# Allegro board powerModule_v1_3.brd
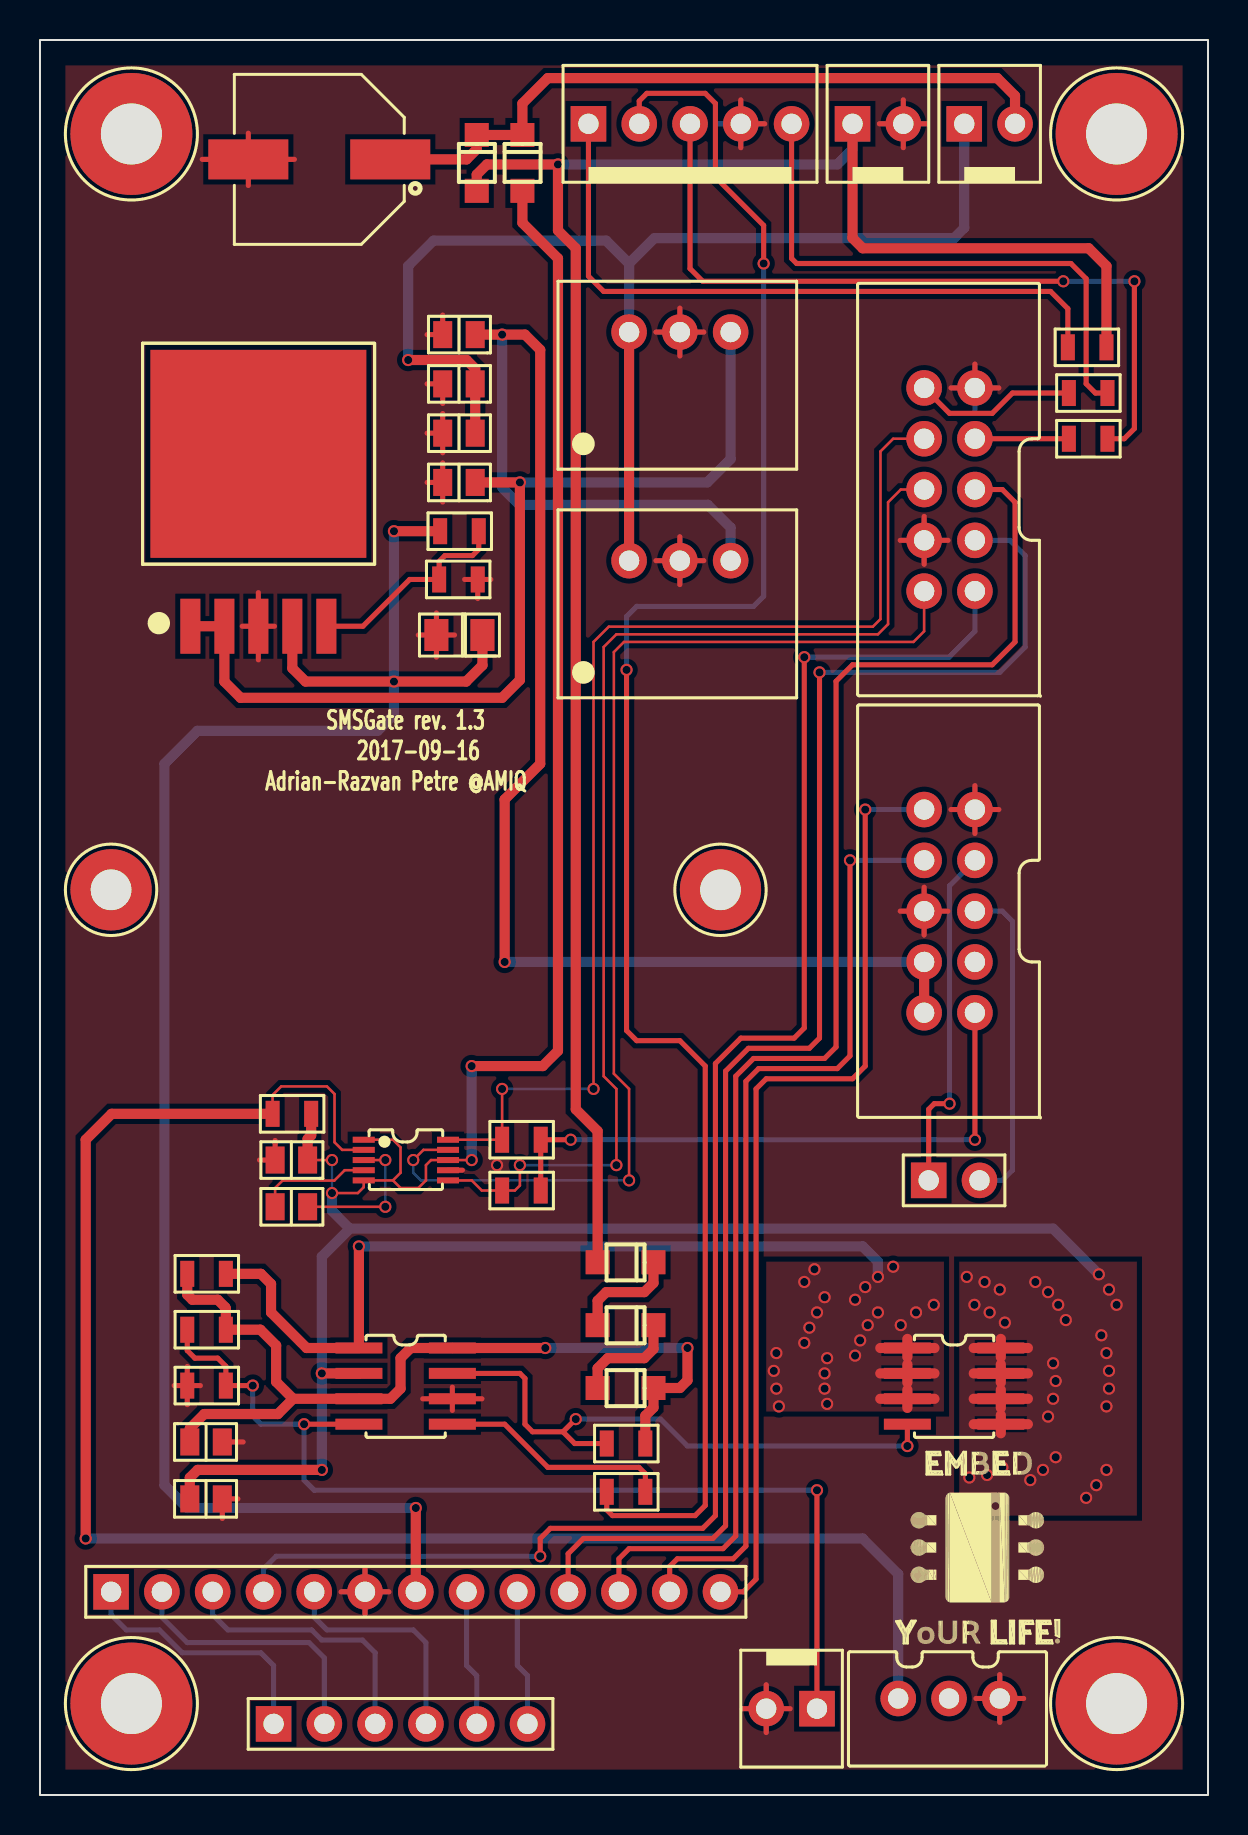
[diagram p0: board, top side]
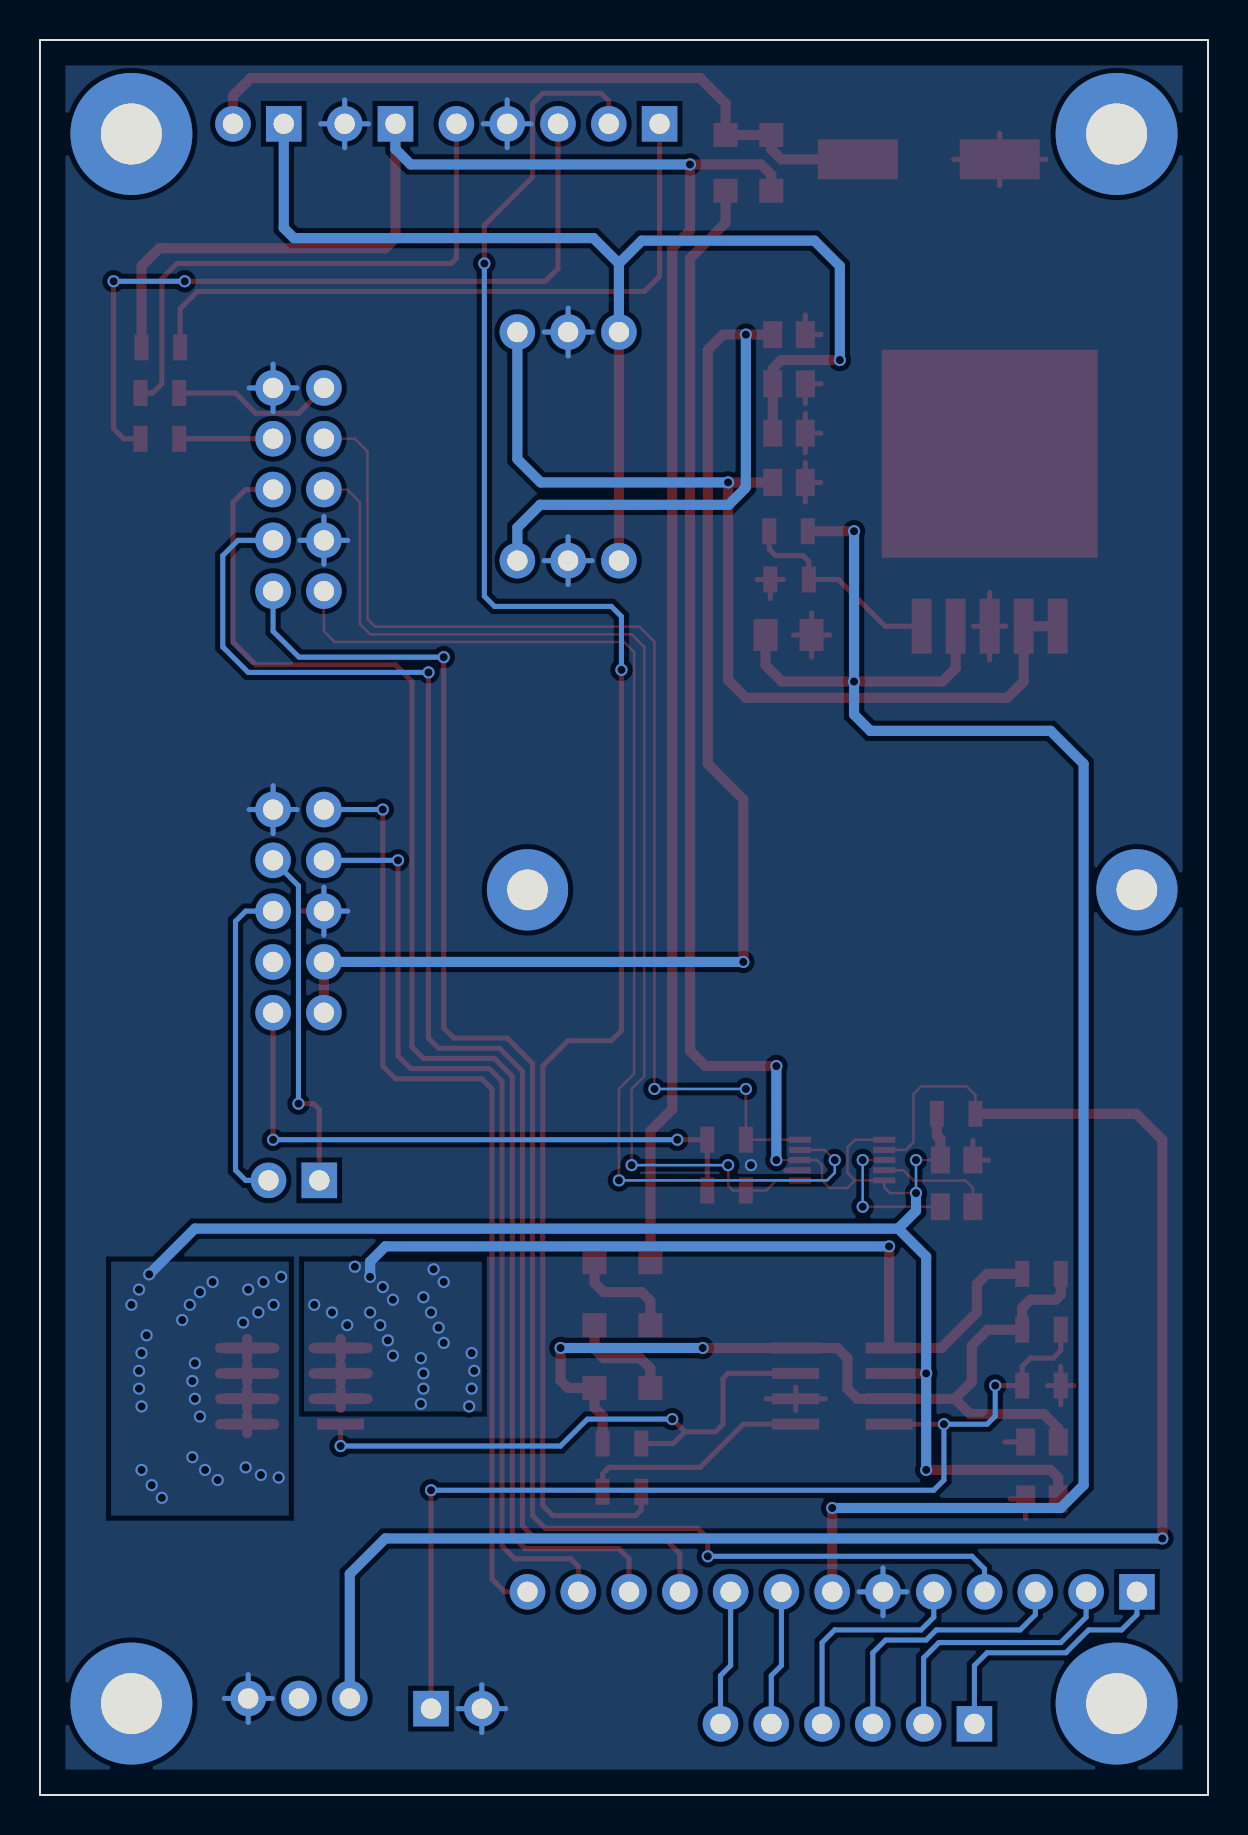
[diagram p1: board, bottom side, seen from below]

Outline 58.42 x 87.76 mm; copper layers: TOP, BOTTOM. Coordinates in mm from the lower left corner of the outline.
Outline path: rectangle 0,0 58.42,87.76

## Design rules (mm)
nets with their own width: min track width 0.127; nets CLR INT POL U2CF+ U2CF-
nets with their own width: min track width 0.254; nets CTS GND LED1 LED1_P3 LED1_P5 LED2 LINE_LED POWER Q1G RESET RI RST RXD SCL1 SDA1 SLP STAT_LED STATUS TS TXD U1STAT VIN VREG2ADJ VUSB
nets with their own width: min track width 0.508; nets +4V +5V +12V BATT CHARGEROUT COMMKAT K1 K2 Q1S SMALLVCC STAB1IN STAB2IN

## Placement (name value [footprint] x y rotation side)
C1  10u  [SMC0805_V1]  20.95 70.56 180 top
C2  22u  [SMC0805_V1]  20.95 65.63 180 top
C3  10u  [TAJ1206_V1]  22.13 58 180 top
C4  470u  [FK_SERIES_SIZE_F_V0]  13.97 81.79 180 top
C5  22u  [SMC0805_V1]  20.95 73.03 180 top
C6  10u  [SMC0805_V1]  20.95 68.1 180 top
C7  100n  [SMC0805_V1]  8.31 14.81 0 top
C8  4.7u  [SMC0805_V1]  12.57 31.75 180 top
C9  100n  [SMC0805_V1]  8.31 17.65 0 top
C10  4.7u  [SMC0805_V1]  12.57 29.41 180 top
D1  PMEG4020ER  [SOD123_V2]  21.84 81.66 90 top
D2  ES07B/G1  [SOD123_V2]  29.34 26.64 0 top
D3  PMEG4020ER  [SOD123_V2]  24.13 81.66 90 top
D4  ES07B/G1  [SOD123_V2]  29.34 23.5 0 top
D5  ES07B/G1  [SOD123_V2]  29.34 20.35 0 top
J1  CON2  [SOCKET_MX_0GRD_1X2_2-54_V0]  46.23 83.57 90 top
J2  CON2  [SOCKET_MX_0GRD_1X2_2-54_V0]  40.64 83.57 90 top
J3  CON5  [SOCKET_MX_0GRD_1X5_2-54_V0]  27.43 83.57 90 top
J4  CON10A  [IDC10_0GRD_2X5_2-54_V3]  45.49 65.28 180 top
J5  CON6  [JUMPER_0GRD_1X6_2-54_V0]  11.68 3.56 90 top
J6  CON13  [JUMPER_0GRD_1X13_2-54_V0]  3.56 10.16 90 top
J7  CON2  [JUMPER_0GRD_1X2_2-54_V0]  44.45 30.73 90 top
J8  CON2  [SOCKET_MX_0GRD_1X2_2-54_V0]  38.86 4.32 270 top
J9  CON10A  [IDC10_0GRD_2X5_2-54_V3]  45.49 44.2 180 top
J10  CON3  [JST3_0GRD_2-54_V0]  42.93 4.83 0 top
NOREF  -  []  0 87.76 0 top
NOREF#2  -  [unnamed#2]  53.85 4.57 0 top
NOREF#3  -  [unnamed#3]  3.56 45.26 0 top
NOREF#4  -  [unnamed#2]  4.57 4.57 0 top
NOREF#5  -  [unnamed#2]  4.57 83.06 0 top
NOREF#6  -  [unnamed#2]  53.85 83.06 0 top
NOREF#7  -  [unnamed#3]  34.04 45.26 0 top
NOREF#8  -  []  42.16 7.11 0 top
NOREF#9  -  []  58.42 0 90 top
Q1  SI4463CDY  [SOIC8_V1]  45.72 22.35 0 top
R1  2k2  [SMR0805_V2]  20.02 63.2 0 top
R2  1k  [SMR0805_V2]  21.89 60.78 180 top
R3  0.68  [SMR0805_V2]  7.37 26.06 0 top
R4  620  [SMR0805_V2]  53.34 72.39 180 top
R5  62  [SMR0805_V2]  51.46 67.82 0 top
R6  1k  [SMR0805_V2]  28.35 17.57 0 top
R7  62  [SMR0805_V2]  51.46 70.1 0 top
R8  12k1  [SMR0805_V2]  7.37 23.27 0 top
R9  0.025  [SMR0805_V2]  11.63 34.06 0 top
R10  1k  [SMR0805_V2]  28.35 15.16 0 top
R11  220k  [SMR0805_V2]  7.37 20.47 0 top
R12  3k3  [SMR0805_V2]  23.11 32.77 0 top
R13  3k3  [SMR0805_V2]  23.11 30.23 0 top
U1  BQ2057WSN  [SOIC8_V1]  18.29 22.35 0 top
U2  LTC4150  [MSOP10_V1]  18.3 32.77 0 top
VREG1  AMSR2-7805-NZ  [AMSR2-7805-NZ_V0]  29.46 73.15 0 top
VREG2  MIC29302WU  [TO_236_5LEAD]  10.92 64.64 90 top
VREG3  AMSR2-7805-NZ  [AMSR2-7805-NZ_V0]  29.46 61.72 0 top

## Library data of the parts
C1 C2 C5-C10 = CAP NP
C3 = CAPACITOR POL
C4 = CAP_1
D1 D3 = DIODE SCHOTTKY_3
D2 D4 D5 = DIODE
J1 J2 J7 J8 = CON2
J3 = CON5
J4 J9 = CON10A
J5 = CON6
J6 = CON12_0
J10 = CON3
Q1 = MOSFET P DGS_4
R1-R13 = R
U1 = BQ2057_1
U2 = LTC4150_7
VREG1 VREG3 = MCP1700_7
VREG2 = MCP1700_9

## Footprints (pads in the part's own frame, mm; a bottom-side part is the same pattern mirrored in y, then rotated)
AMSR2-7805-NZ_V0
  round 1.778 hole 1.016: 1(0,0) 2(2.54,0) 3(5.08,0)
FK_SERIES_SIZE_F_V0
  rect 4x2 smd: 1(-3.55,0) 2(3.55,0)
IDC10_0GRD_2X5_2-54_V3
  round 1.778 hole 1.016: 1(-1.27,5.08) 2(1.27,5.08) 3(-1.27,2.54) 4(1.27,2.54) 5(-1.27,0) 6(1.27,0) 7(-1.27,-2.54) 8(1.27,-2.54) 9(-1.27,-5.08) 10(1.27,-5.08)
JST3_0GRD_2-54_V0
  round 1.778 hole 1.016: 1(0,0) 2(2.54,0) 3(5.08,0)
JUMPER_0GRD_1X2_2-54_V0
  rect 1.778x1.778 hole 1.016: 1(0,0)
  round 1.778 hole 1.016: 2(0,-2.54)
JUMPER_0GRD_1X6_2-54_V0
  rect 1.778x1.778 hole 1.016: 1(0,0)
  round 1.778 hole 1.016: 2(0,-2.54) 3(0,-5.08) 4(0,-7.62) 5(0,-10.16) 6(0,-12.7)
JUMPER_0GRD_1X13_2-54_V0
  rect 1.778x1.778 hole 1.016: 1(0,0)
  round 1.778 hole 1.016: 2(0,-2.54) 3(0,-5.08) 4(0,-7.62) 5(0,-10.16) 6(0,-12.7) 7(0,-15.24) 8(0,-17.78) 9(0,-20.32) 10(0,-22.86) 11(0,-25.4) 12(0,-27.94) 13(0,-30.48)
MSOP10_V1
  rect 1.1x0.3 smd: 1(-2.108,0) 2(-2.108,-0.508) 3(-2.108,-1.016) 4(-2.108,-1.524) 5(-2.108,-2.032) 6(2.108,-2.032) 7(2.108,-1.524) 8(2.108,-1.016) 9(2.108,-0.508) 10(2.108,0)
SMC0805_V1
  rect 0.95x1.35 smd: 1(-0.813,0) 2(0.813,0)
SMR0805_V2
  rect 0.7x1.3 smd: 1(0,0) 2(1.93,0)
SOCKET_MX_0GRD_1X2_2-54_V0
  rect 1.778x1.778 hole 1.016: 1(0,0)
  round 1.778 hole 1.016: 2(0,-2.54)
SOCKET_MX_0GRD_1X5_2-54_V0
  rect 1.778x1.778 hole 1.016: 1(0,0)
  round 1.778 hole 1.016: 2(0,-2.54) 3(0,-5.08) 4(0,-7.62) 5(0,-10.16)
SOD123_V2
  rect 1.2x1.2 smd: 1(1.346,0) 2(-1.446,0)
SOIC8_V1
  rect 2.35x0.55 smd: 1(-2.337,0) 2(-2.337,-1.27) 3(-2.337,-2.54) 4(-2.337,-3.81) 5(2.337,-3.81) 6(2.337,-2.54) 7(2.337,-1.27) 8(2.337,0)
TAJ1206_V1
  rect 1.2x1.6 smd: 1(0,0) 2(2.301,0)
TO_236_5LEAD
  rect 2.75x1 smd: 1(-6.2,3.401) 2(-6.2,1.699) 3(-6.2,0) 4(-6.2,-1.699) 5(-6.2,-3.401)
  rect 10.4x10.8 smd: 6(2.421,0)
unnamed#2
  round 6.096 hole 3.048 unplated: (0,0)
unnamed#3
  round 4.064 hole 2.032 unplated: (0,0)

## Nets
+3V3: J9.1 R12.2 R13.2
+4V: C3.1 J6.7 R1.1 VREG2.4(OUT)
+5V: C5.1 J9.2 J9.4 VREG3.3(OUT)
+12V: D1.2(A) D2.2(A) J2.1 R4.1
GND: C1.2 C2.2 C3.2 C4.2 C5.2 C6.2 C7.2 C8.2 C9.2 J2.2 J3.4 J4.4 J4.9 J6.6 J8.2 J9.6 J9.9 J10.3 R2.1 R11.1 U1.6(VSS) U2.7 VREG1.2 VREG2.3 VREG3.2
VIN: J5.5 J6.8
BATT: J10.1 R9.1 U2.2(SENSE-)
CHARGEROUT: C7.1 C8.1 D3.2(A) Q1.5(D1) Q1.6(D2) Q1.7(D3) Q1.8(D4) R9.2 U1.2(BATT) U2.1(SENSE+) U2.5(\\S\H\D\N) U2.8(VDD)
CLR: J4.2 U2.9(\C\L\R)
COMMKAT: C4.1 D1.1(C) D3.1(C) J1.2
CTS: J5.2 J6.2
INT: J4.8 R12.1 U2.10(\I\N\T)
K1: D2.1(K) D4.2(A)
K2: D4.1(K) D5.2(A)
LED1: J4.7 R5.1
LED1_P3: J3.3 R5.2
LED1_P5: J3.5 R7.2
LED2: J4.10 R7.1
LINE_LED: J3.1 R4.2
POL: J4.6 R13.1 U2.6(POL)
POWER: J4.3 J6.10
Q1G: Q1.4(G) R6.1 U1.7(CC)
Q1S: Q1.1(S1) Q1.2(S2) Q1.3(S3) R3.2 U1.1(SNS)
RESET: J4.5 J6.11
RI: J5.4 J6.5
RST: J5.3 J6.3
RXD: J6.13 J9.10
SCL1: J7.2 J9.5
SDA1: J7.1 J9.7
SLP: J5.1 J6.1
SMALLVCC: C9.1 D5.1(K) R3.1 R6.2 R8.2 U1.3(VCC) U1.8(COMP)
STAB1IN: C1.1 C6.1 J1.1 VREG1.1(VCC) VREG3.1(VCC)
STAB2IN: C2.1 VREG1.3(OUT) VREG2.1(EN) VREG2.2(IN)
STAT_LED: J3.2 R10.1
STATUS: J4.1 J6.4
TS: J8.1 R8.1 R11.2 U1.4(TS)
TXD: J6.12 J9.8
U1STAT: R10.2 U1.5(STAT)
U2CF+: C10.1 U2.3(CF+)
U2CF-: C10.2 U2.4(CF-)
VREG2ADJ: R1.2 R2.2 VREG2.5(ADJ)
VUSB: J5.6 J6.9

Pads without a net: J9 3; J10 2; VREG2 6

## Via types
v1: diameter 0.61, hole 0.406, TOP to BOTTOM, 100 vias

## Routing (per net, layer and track width the routed paths; a pad name or vN(x,y) marks a point on that pad's centre or on a via; arc(x,y) is an arc through that point)
+3V3: length 30.6
  TOP w0.254: R13.2 R12.2 v1(26.54,32.77) ; v1(46.76,32.77) J9.1
  BOTTOM w0.254: v1(26.54,32.77) v1(46.76,32.77)
+4V: length 91
  TOP w0.508: R1.1 v1(17.7,63.2) ; VREG2.4 12.62,56.34 13.28,55.68 v1(17.7,55.68) 21.32,55.68 22.13,56.49 C3.1 ; v1(18.8,14.35) J6.7
  BOTTOM w0.508: v1(18.8,14.35) 7.37,14.35 6.22,15.49 6.22,51.56 7.87,53.21 16.89,53.21 17.7,54.03 v1(17.7,55.68) v1(17.7,63.2)
+5V: length 80
  TOP w0.508: C5.1 v1(23.11,73.03) 24.26,73.03 25.02,72.26 25.02,51.56 23.24,49.78 v1(23.24,41.66) ; J9.4 J9.2
  BOTTOM w0.508: v1(23.11,73.03) 23.11,65.41 23.19,65.33 23.19,65.3 23.97,64.52 33.4,64.52 34.54,63.37 VREG3.3 ; J9.4 v1(23.24,41.66)
+12V: length 100.2
  TOP w0.508: J2.1 40.64,77.85 41.15,77.34 52.45,77.34 53.34,76.45 R4.1 ; D2.2 27.89,33.2 26.8,34.29 26.8,77.34 25.91,78.23 v1(25.91,81.53) 22.35,81.53 21.84,81.03 D1.2
  BOTTOM w0.508: J2.1 40.64,82.3 39.88,81.53 v1(25.91,81.53)
GND: length 141.6
  TOP w0.254: 9.9,14.81 C7.2 9.12,13.83 ; J9.9 47.96,49.28 ; J9.9 46.76,48.08 ; J9.9 45.57,49.28 ; J9.9 46.76,50.47 ; J3.4 35.05,84.76 ; J3.4 35.05,82.37 ; J3.4 36.25,83.57 ; VREG1.2 32,74.35 ; VREG1.2 30.81,73.15 ; VREG1.2 33.2,73.15 ; VREG1.2 32,71.96 ; VREG2.3 11.73,58.44 ; VREG2.3 10.12,58.44 ; VREG2.3 10.92,60.12 ; VREG2.3 10.92,56.76 ; R11.1 8.02,20.47 ; R11.1 7.37,19.52 ; R11.1 6.71,20.47 ; R11.1 7.37,21.43 ; U1.6 20.62,20.39 ; U1.6 20.62,19.23 ; U1.6 19.14,19.81 ; U1.6 22.11,19.81 ; 48.01,3.63 J10.3 ; J10.3 48.01,6.02 ; J10.3 46.81,4.83 ; J10.3 49.2,4.83 ; 19.36,68.1 C6.2 ; C6.2 20.14,69.08 ; C6.2 20.14,67.12 ; J4.4 45.42,62.74 ; J4.4 43.03,62.74 ; J4.4 44.22,61.54 ; J4.4 44.22,63.93 ; C3.2 19.83,59.11 ; C3.2 18.92,58 ; C3.2 20.73,58 ; C3.2 19.83,56.9 ; J4.9 46.76,71.55 ; J4.9 47.96,70.36 ; J4.9 45.57,70.36 ; 44.22,43 J9.6 ; J9.6 44.22,45.39 ; J9.6 45.42,44.2 ; J9.6 43.03,44.2 ; C4.2 10.42,83.09 ; C4.2 10.42,80.48 ; C4.2 8.11,81.79 ; C4.2 12.73,81.79 ; J2.2 44.37,83.57 ; J2.2 43.18,82.37 ; J2.2 43.18,84.76 ; J2.2 41.99,83.57 ; 36.32,3.12 J8.2 ; J8.2 35.13,4.32 ; J8.2 37.52,4.32 ; J8.2 36.32,5.51 ; 20.14,74.01 C5.2 19.36,73.03 ; 21.89,59.83 R2.1 ; R2.1 21.24,60.78 ; R2.1 22.55,60.78 ; 19.36,65.63 C2.2 ; C2.2 20.14,66.61 ; C2.2 20.14,64.65 ; C9.2 10.16,17.65 ; 20.14,69.58 C1.2 19.36,70.56 ; VREG3.2 32,62.92 ; VREG3.2 33.2,61.72 ; VREG3.2 32,60.53 ; VREG3.2 30.81,61.72 ; 10.98,31.75 C8.2 11.76,32.73 ; U2.7 21.13,31.24 ; 16.26,8.97 J6.6 ; J6.6 17.45,10.16 ; J6.6 16.26,11.35 ; J6.6 15.06,10.16
  BOTTOM w0.254: J9.9 46.76,50.47 ; J9.9 45.57,49.28 ; J9.9 46.76,48.08 ; J9.9 47.96,49.28 ; J4.4 44.22,63.93 ; J4.4 43.03,62.74 ; J4.4 44.22,61.54 ; J4.4 45.42,62.74 ; 41.99,83.57 J2.2 ; J2.2 43.18,84.76 ; J2.2 43.18,82.37 ; J2.2 44.37,83.57 ; J10.3 48.01,6.02 ; J10.3 46.81,4.83 ; J10.3 48.01,3.63 ; J10.3 49.2,4.83 ; VREG1.2 33.2,73.15 ; VREG1.2 32,74.35 ; VREG1.2 32,71.96 ; VREG1.2 30.81,73.15 ; VREG3.2 32,62.92 ; VREG3.2 30.81,61.72 ; VREG3.2 33.2,61.72 ; VREG3.2 32,60.53 ; 46.76,69.16 J4.9 ; J4.9 45.57,70.36 ; J4.9 47.96,70.36 ; J4.9 46.76,71.55 ; J6.6 16.26,11.35 ; J6.6 15.06,10.16 ; J6.6 16.26,8.97 ; J6.6 17.45,10.16 ; J9.6 44.22,45.39 ; J9.6 43.03,44.2 ; J9.6 44.22,43 ; 33.86,83.57 J3.4 ; J3.4 35.05,84.76 ; J3.4 36.25,83.57 ; J3.4 35.05,82.37 ; 36.32,3.12 J8.2 ; J8.2 37.52,4.32 ; J8.2 35.13,4.32 ; J8.2 36.32,5.51
  vias: v1(22.86,31.5)
VIN: length 6.8
  BOTTOM w0.254: J6.8 21.34,6.48 21.84,5.97 J5.5
BATT: length 85.8
  TOP w0.127: R9.1 11.63,35 12.06,35.43 14.35,35.43 14.73,35.05 14.73,32.64 15.11,32.26 U2.2
  TOP w0.508: v1(2.29,12.83) 2.29,32.77 3.58,34.06 R9.1
  BOTTOM w0.508: J10.1 42.93,11.05 41.15,12.83 v1(2.29,12.83)
CHARGEROUT: length 148.1
  TOP w0.127: 17.65,30.73 18.03,30.35 18.92,30.35 19.3,30.73 19.3,31.5 19.56,31.75 U2.8 v1(21.59,31.75) ; 17.65,30.73 18.03,31.11 18.03,32.38 17.65,32.77 U2.1 ; 17.65,30.73 U2.5 16.19,30.39 15.9,30.1 v1(14.61,30.1) ; v1(14.61,31.75) C8.1
  TOP w0.508: R9.2 13.56,32.98 13.39,32.81 C8.1 ; v1(14.1,16.26) 7.88,16.26 7.49,15.86 C7.1 ; Q1.6 48.06,20.27 ; Q1.6 49.41,19.81 ; Q1.6 46.7,19.81 ; Q1.6 48.06,19.36 ; D3.2 24.13,78.61 25.91,76.83 25.91,37.21 25.15,36.45 v1(21.59,36.45) ; Q1.7 48.06,21.54 ; Q1.7 49.41,21.08 ; Q1.7 48.06,20.63 ; Q1.7 46.7,21.08 ; Q1.8 48.06,22.81 ; Q1.8 48.06,21.9 ; Q1.8 46.7,22.35 ; Q1.8 49.41,22.35 ; v1(14.1,21.08) U1.2 ; Q1.5 49.41,18.54 ; Q1.5 46.7,18.54 ; Q1.5 48.06,18.09 ; Q1.5 48.06,19
  BOTTOM w0.127: v1(14.61,31.75) v1(14.61,30.1)
  BOTTOM w0.508: 15.49,28.32 14.1,26.92 v1(14.1,21.08) v1(14.1,16.26) ; 15.49,28.32 50.67,28.32 v1(52.96,26.04) ; 15.49,28.32 14.61,29.21 v1(14.61,30.1) ; v1(21.59,36.45) v1(21.59,31.75)
  vias: v1(46.35,25.91) v1(46.48,15.88) v1(46.74,24.51) v1(47.24,25.65) v1(47.37,16) v1(47.5,24.13) v1(48.01,25.27) v1(48.13,16.38) v1(48.26,23.62) v1(49.53,15.75) v1(49.78,25.65) v1(50.16,16.26) v1(50.42,25.15) v1(50.42,18.92) v1(50.67,21.59) v1(50.67,19.81) v1(50.8,20.7) v1(50.8,16.89) v1(50.93,24.51) v1(51.31,23.75) v1(52.32,14.86) v1(52.83,15.49) v1(53.09,22.99) v1(53.34,22.1) v1(53.34,19.43) v1(53.34,16.26) v1(53.47,25.27) v1(53.47,21.21) v1(53.47,20.32) v1(53.85,24.51)
CLR: length 58.2
  TOP w0.127: v1(18.67,31.75) 19.18,32.26 U2.9 ; v1(29.46,30.73) 29.46,35.31 28.7,36.07 28.7,57.15 29.21,57.66 43.69,57.66 44.22,58.19 J4.2
  BOTTOM w0.127: v1(18.67,31.75) 18.67,31.11 19.05,30.73 v1(29.46,30.73)
COMMKAT: length 36
  TOP w0.508: J1.2 48.77,84.96 47.88,85.85 25.4,85.85 24.13,84.58 D3.1 D1.1 21.84,82.3 21.34,81.79 C4.1
CTS: length 13.5
  BOTTOM w0.254: J5.2 14.22,6.86 13.46,7.62 7.37,7.62 6.1,8.89 J6.2
INT: length 57.8
  TOP w0.127: J4.8 42.67,67.82 42.04,67.18 42.04,58.8 41.66,58.42 28.45,58.42 27.69,57.66 v1(27.69,35.31) ; v1(23.11,35.31) R12.1 U2.10
  BOTTOM w0.127: v1(27.69,35.31) v1(23.11,35.31)
K1: length 5.4
  TOP w0.508: D4.2 27.89,24.72 28.32,25.15 30.23,25.15 30.68,25.6 D2.1
K2: length 5.4
  TOP w0.508: D5.2 27.89,21.34 28.4,21.84 30.23,21.84 30.68,22.3 D4.1
LED1: length 4.7
  TOP w0.254: R5.1 J4.7
LED1_P3: length 38.6
  TOP w0.254: v1(51.18,75.69) 33.15,75.69 32.51,76.33 J3.3 ; R5.2 54.23,67.82 54.74,68.33 v1(54.74,75.69)
  BOTTOM w0.254: v1(51.18,75.69) v1(54.74,75.69)
LED1_P5: length 28.4
  TOP w0.254: J3.5 37.59,76.83 37.85,76.58 51.56,76.58 52.32,75.82 52.32,70.57 52.79,70.1 R7.2
LED2: length 8.2
  TOP w0.254: J4.10 45.49,69.09 47.62,69.09 48.64,70.1 R7.1
LINE_LED: length 34.2
  TOP w0.254: R4.2 51.41,74.32 50.55,75.18 28.19,75.18 27.43,75.95 J3.1
POL: length 58.8
  TOP w0.127: J4.6 43.05,65.28 42.42,64.64 42.42,58.55 41.91,58.04 28.83,58.04 28.19,57.4 28.19,35.94 28.83,35.31 v1(28.83,31.5) ; U2.6 21.59,30.73 22.1,30.23 R13.1 23.75,30.23 24,30.48 v1(24,31.5)
  BOTTOM w0.127: v1(28.83,31.5) v1(24,31.5)
POWER: length 75
  TOP w0.254: J6.10 26.42,12.06 27.18,12.83 33.66,12.83 34.29,13.46 34.29,36.2 35.43,37.34 38.48,37.34 38.99,37.85 v1(38.99,56.13)
  BOTTOM w0.254: J4.3 48.51,62.74 49.28,61.98 49.28,57.4 48.01,56.13 v1(38.99,56.13)
Q1G: length 29.7
  TOP w0.254: 26.16,18.16 26.74,17.57 R6.1 ; 26.16,18.16 26.79,18.8 v1(26.8,18.8) ; 26.16,18.16 24.64,18.16 24.26,18.54 24.26,20.83 24,21.08 U1.7 ; Q1.4 v1(43.38,17.45)
  BOTTOM w0.254: v1(43.38,17.45) 32.38,17.45 31.04,18.8 v1(26.8,18.8)
Q1S: length 52
  TOP w0.508: Q1.2 43.38,21.54 ; Q1.2 42.03,21.08 ; Q1.2 44.74,21.08 ; Q1.2 43.38,20.63 ; Q1.3 44.74,19.81 ; Q1.3 42.03,19.81 ; Q1.3 43.38,20.27 ; Q1.3 43.38,19.36 ; v1(15.95,27.43) U1.1 13.34,22.35 11.56,24.13 11.56,25.55 11.05,26.06 R3.2 ; 42.03,22.35 Q1.1 ; Q1.1 43.38,21.9 ; Q1.1 44.74,22.35 ; Q1.1 43.38,22.81
  BOTTOM w0.508: v1(15.95,27.43) 41.15,27.43 41.91,26.67 v1(41.91,25.91)
  vias: v1(36.7,21.21) v1(36.83,22.1) v1(36.83,20.32) v1(36.96,19.43) v1(38.23,25.65) v1(38.23,22.61) v1(38.48,23.37) v1(38.73,26.29) v1(38.86,24.13) v1(39.24,24.89) v1(39.24,21.08) v1(39.24,20.32) v1(39.37,21.84) v1(39.37,19.56) v1(40.77,24.77) v1(40.77,21.97) v1(41.02,22.73) v1(41.27,25.4) v1(41.4,23.5) v1(41.91,24.13) v1(42.67,26.42) v1(43.05,23.5) v1(43.81,24.13) v1(44.7,24.51)
RESET: length 73.9
  TOP w0.254: J4.5 48.13,65.28 48.77,64.64 48.77,57.66 47.62,56.52 40.64,56.52 39.81,55.69 39.81,37.4 39.24,36.83 35.69,36.83 34.8,35.94 34.8,12.95 34.16,12.32 29.46,12.32 28.96,11.81 J6.11
RI: length 11.4
  BOTTOM w0.254: J6.5 13.72,8.89 14.35,8.26 18.67,8.26 19.3,7.62 J5.4
RST: length 13.6
  BOTTOM w0.254: J6.3 8.64,9.02 9.4,8.26 13.59,8.26 14.1,7.75 16.13,7.75 16.76,7.11 J5.3
RXD: length 48.3
  TOP w0.254: v1(41.27,49.28) 41.27,36.45 40.64,35.81 36.32,35.81 35.81,35.31 35.81,10.79 35.18,10.16 J6.13
  BOTTOM w0.254: J9.10 v1(41.27,49.28)
SCL1: length 16.4
  BOTTOM w0.254: J9.5 48.13,44.2 48.64,43.69 48.64,31.24 48.13,30.73 J7.2
SDA1: length 17.4
  TOP w0.254: J7.1 44.45,34.29 44.73,34.57 v1(45.49,34.57)
  BOTTOM w0.254: v1(45.49,34.57) 45.49,45.47 J9.7
SLP: length 13.2
  BOTTOM w0.254: J6.1 3.56,9.02 4.32,8.26 5.97,8.26 7.11,7.11 11.05,7.11 11.68,6.48 J5.1
SMALLVCC: length 44.7
  TOP w0.508: R6.2 30.28,18.97 30.68,19.37 D5.1 32,20.35 32.38,20.73 v1(32.38,22.35) ; 12.66,19.81 11.81,20.66 11.81,22.48 11.02,23.27 R8.2 9.3,24.3 9.27,24.32 9.27,24.38 8.89,24.77 7.62,24.77 7.37,25.02 R3.1 ; 12.66,19.81 11.9,19.05 8.22,19.05 7.49,18.33 C9.1 ; 12.66,19.81 U1.3 17.53,19.81 18.03,20.32 18.03,21.84 18.54,22.35 U1.8 v1(25.27,22.35)
  BOTTOM w0.508: v1(25.27,22.35) v1(32.38,22.35)
STAB1IN: length 61.1
  TOP w0.508: VREG1.1 VREG3.1 ; C6.1 C1.1 21.77,71.32 21.34,71.75 v1(18.41,71.75)
  BOTTOM w0.508: v1(18.41,71.75) 18.41,76.45 19.68,77.72 28.32,77.72 29.46,76.58 ; VREG1.1 29.46,76.58 ; 29.46,76.58 30.73,77.85 45.72,77.85 46.23,78.36 J1.1
STAB2IN: length 49.4
  TOP w0.508: C2.1 v1(24,65.63) 24,55.75 23.11,54.86 10.03,54.86 9.22,55.67 VREG2.2 VREG2.1
  BOTTOM w0.508: v1(24,65.63) 33.38,65.63 34.54,66.8 VREG1.3
STAT_LED: length 91.7
  TOP w0.254: R10.1 28.35,14.26 28.63,13.97 32.77,13.97 33.27,14.48 33.27,36.45 32,37.72 29.84,37.72 29.34,38.23 v1(29.34,56.26) ; J3.2 29.97,84.71 30.35,85.09 33.27,85.09 33.78,84.58 33.78,80.9 36.2,78.49 v1(36.2,76.58)
  BOTTOM w0.254: v1(36.2,76.58) 36.2,59.94 35.69,59.44 29.84,59.44 29.34,58.93 v1(29.34,56.26)
STATUS: length 82.8
  TOP w0.254: v1(38.23,56.9) 38.23,38.35 37.72,37.85 35.05,37.85 33.78,36.58 33.78,13.97 33.15,13.34 25.53,13.34 25.02,12.83 v1(25.02,11.94)
  BOTTOM w0.254: J6.4 11.18,11.3 11.81,11.94 v1(25.02,11.94) ; v1(38.23,56.9) 45.47,56.9 46.76,58.19 J4.1
TS: length 52.2
  TOP w0.254: v1(38.86,15.24) J8.1 ; U1.4 v1(13.21,18.54) ; R8.1 7.37,22.23 7.75,21.84 8.89,21.84 9.3,21.44 R11.2 v1(10.64,20.47)
  BOTTOM w0.254: v1(10.64,20.47) 10.64,18.95 11.05,18.54 v1(13.21,18.54) 13.21,15.75 13.72,15.24 v1(38.86,15.24)
TXD: length 48
  TOP w0.254: J6.12 31.5,11.43 31.88,11.81 34.67,11.81 35.31,12.45 35.31,35.69 35.94,36.32 39.88,36.32 40.51,36.96 v1(40.51,46.74)
  BOTTOM w0.254: J9.8 v1(40.51,46.74)
U1STAT: length 11.6
  TOP w0.254: U1.5 23.24,18.54 25.4,16.38 29.96,16.38 30.28,16.06 R10.2
U2CF+: length 7.3
  TOP w0.127: U2.3 v1(17.27,31.75) ; v1(17.27,29.41) C10.1
  BOTTOM w0.127: v1(17.27,31.75) v1(17.27,29.41)
U2CF-: length 5.7
  TOP w0.127: C10.2 11.76,30.35 12.13,30.72 14.72,30.72 15.24,31.24 U2.4
VREG2ADJ: length 10.7
  TOP w0.254: VREG2.5 16.15,58.44 18.49,60.78 R2.2 19.96,61.69 20.25,61.98 21.63,61.98 21.95,62.29 R1.2
VUSB: length 6.8
  BOTTOM w0.254: J5.6 24.38,5.97 23.88,6.48 J6.9

## Copper pours and planes (outline as drawn; the poured copper is in the pictures)
GND on TOP: 1.27,1.27 1.27,86.49 57.15,86.49 57.15,1.27 ; 4 cut-outs
GND on BOTTOM: 1.27,1.27 1.27,86.49 57.15,86.49 57.15,1.27
CHARGEROUT on TOP, BOTTOM: 54.86,13.97 54.86,26.67 45.97,26.67 45.97,13.97
Q1S on TOP, BOTTOM: 45.21,19.18 45.21,26.67 36.32,26.67 36.32,19.18

## Text on the board
Ref Des/Silkscreen Top: Adrian-Razvan Petre @AMIQ | SMSGate rev. 1.3 | 2017-09-16
XSECTION_CHART: *  SURFACE - AIR 0 MIL | L1: TOP CONDUCTOR - COPPER 1.37 MIL | *  DIELECTRIC - FR-4 63 MIL | L2: BOTTOM CONDUCTOR - COPPER 1.37 MIL | DESIGN CROSS SECTION CHART | ___________________________ | TOTAL THICKNESS 65.74 MIL | 1-2 | FIGURE | SIZE | 16.0 | 40.0 | 80.0 | 120.0 | DRILL CHART: TOP to BOTTOM | ALL UNITS ARE IN MILS | PLATED | NON-PLATED | QTY | 100 | 61 | 2 | 4
